# Altium PCB USBFaceplate.PcbDoc
Units mm, origin at the board's own origin, x right, y up, seen from the top; angles counter-clockwise.
Board outline 60 x 22.7 mm, 2 copper layers (Top Layer, Bottom Layer); 1 components, 0 nets, 0 pads, 0 vias.
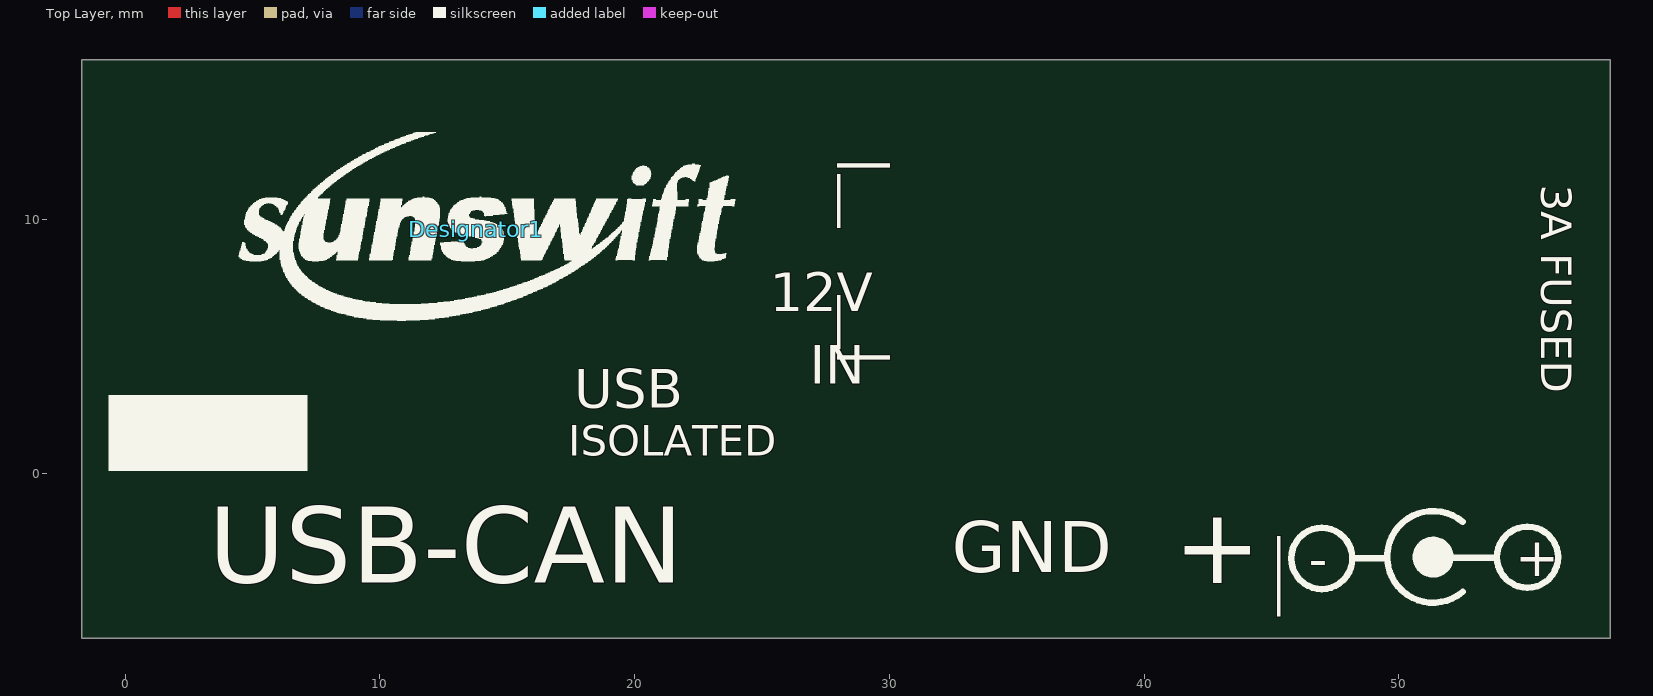
[diagram p0: Top Layer view]
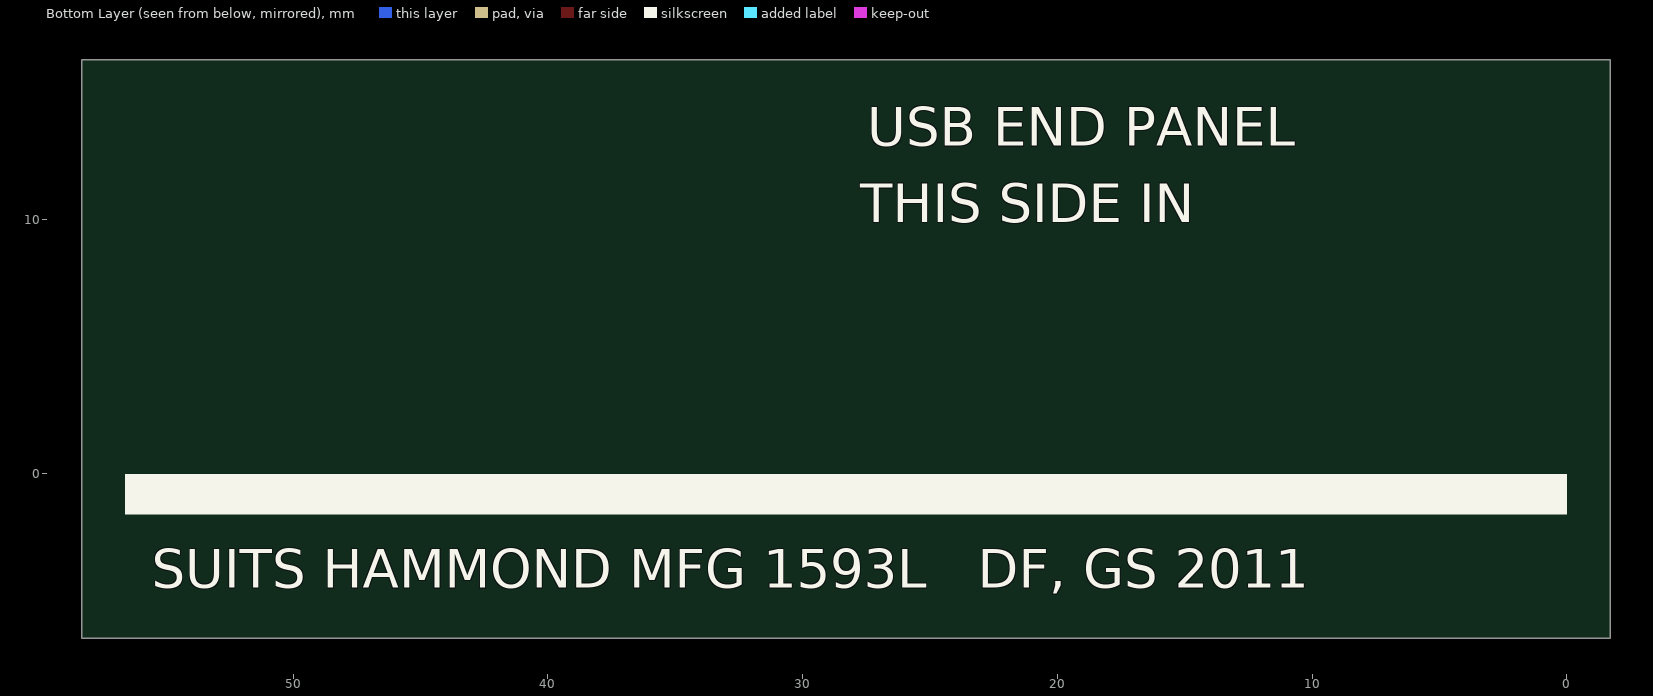
[diagram p1: Bottom Layer view, seen from below]

## Layer stack, top to bottom
Top Layer: signal copper 0.0356
Dielectric: dielectric 0.32, FR-4, Dk 4.8
Bottom Layer: signal copper 0.0356

## Board outline
-1.7,-6.45 -1.7,16.25 58.295,16.25 58.3,-6.45

## Design rules (kind name [scope] priority, off if disabled: settings)
Clearance [All] p1: gap=0.254
PolygonConnect [All] p1: connectstyle=Relief reliefconductorwidth=0.254 reliefentries=4 polygonreliefangle="90 Angle"
RoutingVias [All] p1: holewidth=0.711 width=1.27 viastyle="Through Hole" minholewidth=0.711 minwidth=1.27 maxholewidth=0.711 maxwidth=1.27
SilkscreenOverComponentPads [All] p1: minsilkscreentomaskgap=0.254
SolderMaskExpansion [All] p1: expansion=0.102
TestPointUsage [All] p1: valid=0 allowmultiple=FALSE
Testpoint [All] p1: side=15 testpointundercomponent=TRUE minsize=1.016 maxsize=2.54 preferedsize=1.524 minholesize=0 maxholesize=1.016 preferedholesize=0.813 testpointgrid=0.025 style=1023 order=0123456789
Width [All] p1: maxlimit=0.254 minlimit=0.254 preferedwidth=0.254
23 further rules are at their usual default settings.

## Components (designator, comment, footprint, x,y, rotation, side; value= is the part's Value field where it differs from the comment)
Designator1 "Comment" SUNSWIFTLOGO 13.775,9.6 r0 top

## Footprints (in the part's own frame and the unit in brackets; to place one, negate y for a bottom-side part, rotate by r counter-clockwise, add the part's x,y. Pads: shape width x height; smd on the part's side, far side on the other; paste and mask are expansions set on the pad)
SUNSWIFTLOGO [mm] "Sunswift Logo"
  silkscreen extent -9.32,-3.58 10.19,3.81

## Nets (pads, with @x,y where several pads share a name; then routed paths per layer and width w, separated by ;. In a path a pad name is that pad's centre, name@x,y a point inside that pad or via, vN(x,y) a via of type N, cw(c..) or ccw(c..) an arc to the next point about the centre after c; other vN are vias at no path point)

## Silkscreen, mask and mechanical layers (free items; w line width, h text height)
Top Overlay:
  circle w0.81: c51.35,-3.275 r0.4
  circle w0.254: c55.055,-3.275 r1.2
  circle w0.254: c46.98,-3.325 r1.2
  rectangle: -0.65,0.1 7.15,3.1
  lines w0.254: 48.25,-3.325 49.55,-3.325 ; 51.4,-3.3 53.8,-3.3 ; 52.505,-4.641 cw(c51.348,-3.262) 52.505,-1.883
  text "|__    __|" at 28.45,12.45 h1.52 r270
  text "3A FUSED" at 55.6,11.35 h1.2 r270
  text "12V" at 25.3,6.375 h1.52
  text "IN" at 26.875,3.525 h1.52
  text "USB" at 17.625,2.6 h1.52
  text "ISOLATED" at 17.4,0.7 h1.2
  text "GND" at 32.45,-3.875 h2
  text "+" at 54.575,-4.025 h1.5
  text "-" at 46.475,-4.075 h1.5
  text "USB-CAN" at 3.275,-4.275 h3
  text "+" at 41.175,-4.3 h3
  text "___" at 44.875,-5.6 h1.52 r90
Bottom Overlay:
  rectangle: 0,-1.6 56.6,0
  text "USB END PANEL" at 27.475,12.875 h1.52
  text "THIS SIDE IN" at 27.75,9.875 h1.52
  text "SUITS HAMMOND MFG 1593L   DF, GS 2011" at 55.55,-4.475 h1.52
Mechanical 1:
  circle w0.254: c2.76,5 r1.6
  lines w0.254: 44.94,13 30.94,13 30.94,-1 54.95,-1 ; 44.95,12 55,12 55,-1 ; 44.95,12.025 44.95,13 ; 58.295,16.25 58.3,-6.45 -1.7,-6.45 -1.7,16.25 31.31,16.25 58.3,16.25 ; 7.8,-0.5 7.8,4.5 16.8,4.5 16.8,-0.5 7.8,-0.5